# EAGLE board ext_pcb_Abdallah_version1.0 (EAGLE 7.4.0)

Size 149.86 x 149.86 mm. Coordinates in mm from the lower left corner, seen from the top.
Outline: 0,0 0,149.86 149.86,149.86 149.86,0 0,0
Copper layers (1*16): Top 0.035mm / dielectric 1.5mm / Bottom 0.035mm
Design rules "default": minimum track width 10mil, minimum drill 24mil, track to track 8mil, track to pad 8mil, pad to pad 8mil, via to via 8mil, smd to smd 8mil, copper to edge 40mil, drill to drill 8mil, minimum pad ring 10mil, minimum via ring 8mil, stop-mask expansion 4mil, vias tented up to drill 0mil, thermal gap 10mil

## Footprints (pad centres in the part's own frame; a part is rotated, then mirrored left to right if it is on the bottom)
C0805 = smd 1.3 x 1.5: 1 -0.85,0; 2 0.85,0
53047-08 = drill 0.5 pad 0.698 long: 1 4.375,0.45; 2 3.125,0.45; 3 1.875,0.45; 4 0.625,0.45; 5 -0.625,0.45; 6 -1.875,0.45; 7 -3.125,0.45; 8 -4.375,0.45
53047-06 = drill 0.5 pad 0.698 long: 1 3.125,0.45; 2 1.875,0.45; 3 0.625,0.45; 4 -0.625,0.45; 5 -1.875,0.45; 6 -3.125,0.45
MCV4 = drill 1.22 pad 1.676 long: 1 -2.5,0; 2 0,0; 3 2.5,0; 4 5,0
53047-04 = drill 0.5 pad 0.698 long: 1 1.875,0.45; 2 0.625,0.45; 3 -0.625,0.45; 4 -1.875,0.45
MCV6 = drill 1.22 pad 1.676 long: 1 -5,0; 2 -2.5,0; 3 0,0; 4 2.5,0; 5 5,0; 6 7.5,0
1X02 = drill 1.016 long: 1 -1.27,0; 2 1.27,0
MCV2 = drill 1.22 pad 1.676 long: 1 0,0; 2 2.5,0
1X10 = drill 1.016 pad 1.88: 1 0,0; 2 2.54,0; 3 5.08,0; 4 7.62,0; 5 10.16,0; 6 12.7,0; 7 15.24,0; 8 17.78,0; 9 20.32,0; 10 22.86,0
LED-1206 = smd 1.2 x 1.4: A -1.5,0; C 1.5,0
1X03 = drill 1.016 pad 1.88: 1 0,0; 2 2.54,0; 3 5.08,0
0805 = smd 0.8 x 1.2: 1 -0.9,0; 2 0.9,0
SJW = smd 1.27 x 2.54: 1 -1.27,0; 2 1.27,0
SWITCH-SPDT = drill 1.016 pad 1.88: 1 0,2.54; 2 0,0; 3 0,-2.54
SOT23-5L = smd 0.55 x 1.2: 1 -0.95,-1.3; 2 0,-1.3; 3 0.95,-1.3; 4 0.95,1.3; 5 -0.95,1.3
SO16 = smd 0.66 x 2.032: 1 -4.445,-3.073; 2 -3.175,-3.073; 3 -1.905,-3.073; 4 -0.635,-3.073; 5 0.635,-3.073; 6 1.905,-3.073; 7 3.175,-3.073; 8 4.445,-3.073; 9 4.445,3.073; 10 3.175,3.073; 11 1.905,3.073; 12 0.635,3.073; 13 -0.635,3.073; 14 -1.905,3.073; 15 -3.175,3.073; 16 -4.445,3.073

## Placement (x,y rotation side)
C1  [C0805]  -74.93,83.82 0 top  (outside the outline)
C2  [C0805]  -80.01,83.82 0 top  (outside the outline)
CN2  53047-08  [53047-08]  -48.26,78.74 0 top  (outside the outline)
CN3  53047-06  [53047-06]  -62.23,66.04 0 top  (outside the outline)
CN4  MCV_05/4-G-2,5V  [MCV4]  -38.1,7.62 0 top  (outside the outline)
CN5  53047-04  [53047-04]  -73.66,66.04 0 top  (outside the outline)
CN6  MCV_05/4-G-2,5V  [MCV4]  -60.96,7.62 0 top  (outside the outline)
CN7  MCV_05/4-G-2,5V  [MCV4]  -30.48,24.13 0 top  (outside the outline)
CN8  MCV_05/4-G-2,5V  [MCV4]  -53.34,24.13 0 top  (outside the outline)
CN9  MCV_05/6-G-2,5V  [MCV6]  -73.66,24.13 0 top  (outside the outline)
CN10  MCV_05/4-G-2,5V  [MCV4]  -30.48,39.37 0 top  (outside the outline)
CN11  MCV_05/4-G-2,5V  [MCV4]  -53.34,39.37 0 top  (outside the outline)
CN12  MCV_05/4-G-2,5V  [MCV4]  -76.2,39.37 0 top  (outside the outline)
CN13  MCV_05/4-G-2,5V  [MCV4]  -30.48,54.61 0 top  (outside the outline)
CN14  [1X02]  -80.01,64.77 0 top  (outside the outline)
CN15  MCV_05/2-G-2,5V  [MCV2]  -55.88,54.61 0 top  (outside the outline)
CN16  MCV_05/2-G-2,5V  [MCV2]  -78.74,54.61 0 top  (outside the outline)
CN17  MCV_05/2-G-2,5V  [MCV2]  -33.02,69.85 0 top  (outside the outline)
CN24  [1X10]  80.01,72.39 90 top
CN25  [1X10]  90.17,72.39 90 top
D1  RED  [LED-1206]  -69.85,85.09 0 top  (outside the outline)
JP1  [1X03]  -46.99,83.82 0 top  (outside the outline)
JP2  [1X03]  -55.88,83.82 0 top  (outside the outline)
JP3  [1X03]  -64.77,83.82 0 top  (outside the outline)
R1  [0805]  -15.24,88.9 0 top  (outside the outline)
R2  [0805]  -19.05,88.9 0 top  (outside the outline)
R3  [0805]  -22.86,88.9 0 top  (outside the outline)
R4  [0805]  -26.67,88.9 0 top  (outside the outline)
R5  [0805]  -30.48,88.9 0 top  (outside the outline)
R6  [0805]  -34.29,88.9 0 top  (outside the outline)
SJ1  [SJW]  -15.24,78.74 0 top  (outside the outline)
SJ2  [SJW]  -20.32,78.74 0 top  (outside the outline)
SJ3  [SJW]  -25.4,78.74 0 top  (outside the outline)
SJ4  [SJW]  -30.48,78.74 0 top  (outside the outline)
SJ5  [SJW]  -35.56,78.74 0 top  (outside the outline)
SW1  [SWITCH-SPDT]  -15.24,6.35 0 top  (outside the outline)
U1  LP298XS  [SOT23-5L]  -54.61,66.04 0 top  (outside the outline)
U2  4049D  [SO16]  -40.64,66.04 0 top  (outside the outline)

## Library data of the parts
C1 C2 U1 = adafruit
CN2 = con-molex; MPN: 53047-0810; OC_FARNELL: 1012258; OC_NEWARK: 98K9826
CN3 = con-molex; MPN: 53047-0610-C; OC_FARNELL: 9733078; OC_NEWARK: 03M2965
CN4 CN6-CN13 CN15-CN17 = con-phoenix-250
CN5 = con-molex; MF: WALDOM/MOLEX; MPN: 53047-0410; OC_FARNELL: 9733060; OC_NEWARK: 38C9900
CN14 = pinhead
CN24 CN25 = SparkFun-Connectors; PROD_ID: CONN-11563
D1 = SparkFun-LED; PROD_ID: DIO-09912
JP1-JP3 = SparkFun-Connectors
R1-R6 = SparkFun-Resistors
SJ1-SJ5 = jumper
SW1 = SparkFun-Electromechanical; PROD_ID: SWCH-08261
U2 = 40xx

## Nets
CN2_5V: CN2.2
CN3_5V: CN3.3
CN5_5V: CN5.2
GND: C1.2 C2.2 CN2.1 CN3.1 CN3.2 CN4.4 CN5.1 CN6.1 CN7.1 CN8.1 CN9.1 CN10.4 CN11.2 CN12.2 CN13.2 CN14.2 CN15.1 CN16.1 CN17.1 CN24.2 U1.2 U2.8
INV_OUT1: JP1.3 U2.2
INV_OUT2: JP2.3 U2.4
INV_OUT3: JP3.3 U2.6
MW_D+: CN4.3 CN10.3
MW_D-: CN4.2 CN10.2
MW_DTR: CN3.6 CN9.6 SJ3.1
MW_RX0: CN3.4 CN9.4 CN25.9
MW_RX1: CN2.7 JP1.2
MW_RX1IN: CN6.3 JP1.1 U2.3
MW_RX2: CN2.5 JP2.2
MW_RX2IN: CN7.3 JP2.1 U2.5
MW_RX3: CN2.3 JP3.2
MW_RX3IN: CN8.3 JP3.1 U2.7
MW_SCL: CN5.4 CN11.4 CN12.4 CN13.4
MW_SDA: CN5.3 CN11.3 CN12.3 CN13.3
MW_TX0: CN3.5 CN9.5 CN25.10 R6.1
MW_TX1: CN2.8 CN6.4
MW_TX2: CN2.6 CN7.4
MW_TX3: CN2.4 CN8.4
N$1: CN24.9 SJ3.2
N$2: CN24.6 SJ2.1
N$3: CN24.5 SJ1.1
N$4: R1.1 SJ1.2
N$5: R2.1 SJ2.2
N$6: CN25.3 SJ4.1
N$7: R3.1 SJ4.2
N$8: D1.C R4.2
N$10: R5.1 SJ5.2
N$11: CN25.4 R4.1
N$12: CN25.5 SJ5.1
USB_5V: CN4.1 CN10.1
V3_3: C2.1 CN9.3 CN17.2 CN24.1 D1.A R1.2 R2.2 R3.2 R5.2 R6.2 U1.5
VCC: C1.1 CN6.2 CN7.2 CN8.2 CN9.2 CN11.1 CN12.1 CN13.1 CN15.2 CN16.2 SW1.1 U1.1 U1.3 U2.1
VCC_IN: CN14.1 SW1.2

## Tracks (layer width: path | path; a pad name or v marks a point on that pad's centre or on a via)
GND  (21 unrouted)
INV_OUT1  (1 unrouted)
INV_OUT2  (1 unrouted)
INV_OUT3  (1 unrouted)
MW_D+  (1 unrouted)
MW_D-  (1 unrouted)
MW_DTR  (2 unrouted)
MW_RX0  (2 unrouted)
MW_RX1  (1 unrouted)
MW_RX1IN  (2 unrouted)
MW_RX2  (1 unrouted)
MW_RX2IN  (2 unrouted)
MW_RX3  (1 unrouted)
MW_RX3IN  (2 unrouted)
MW_SCL  (3 unrouted)
MW_SDA  (3 unrouted)
MW_TX0  (3 unrouted)
MW_TX1  (1 unrouted)
MW_TX2  (1 unrouted)
MW_TX3  (1 unrouted)
N$1  (1 unrouted)
N$2  (1 unrouted)
N$3  (1 unrouted)
N$4  (1 unrouted)
N$5  (1 unrouted)
N$6  (1 unrouted)
N$7  (1 unrouted)
N$8  (1 unrouted)
N$10  (1 unrouted)
N$11  (1 unrouted)
N$12  (1 unrouted)
USB_5V  (1 unrouted)
V3_3  (10 unrouted)
VCC  (13 unrouted)
VCC_IN  (1 unrouted)